# EAGLE board SHT31 (EAGLE 9.4.2)
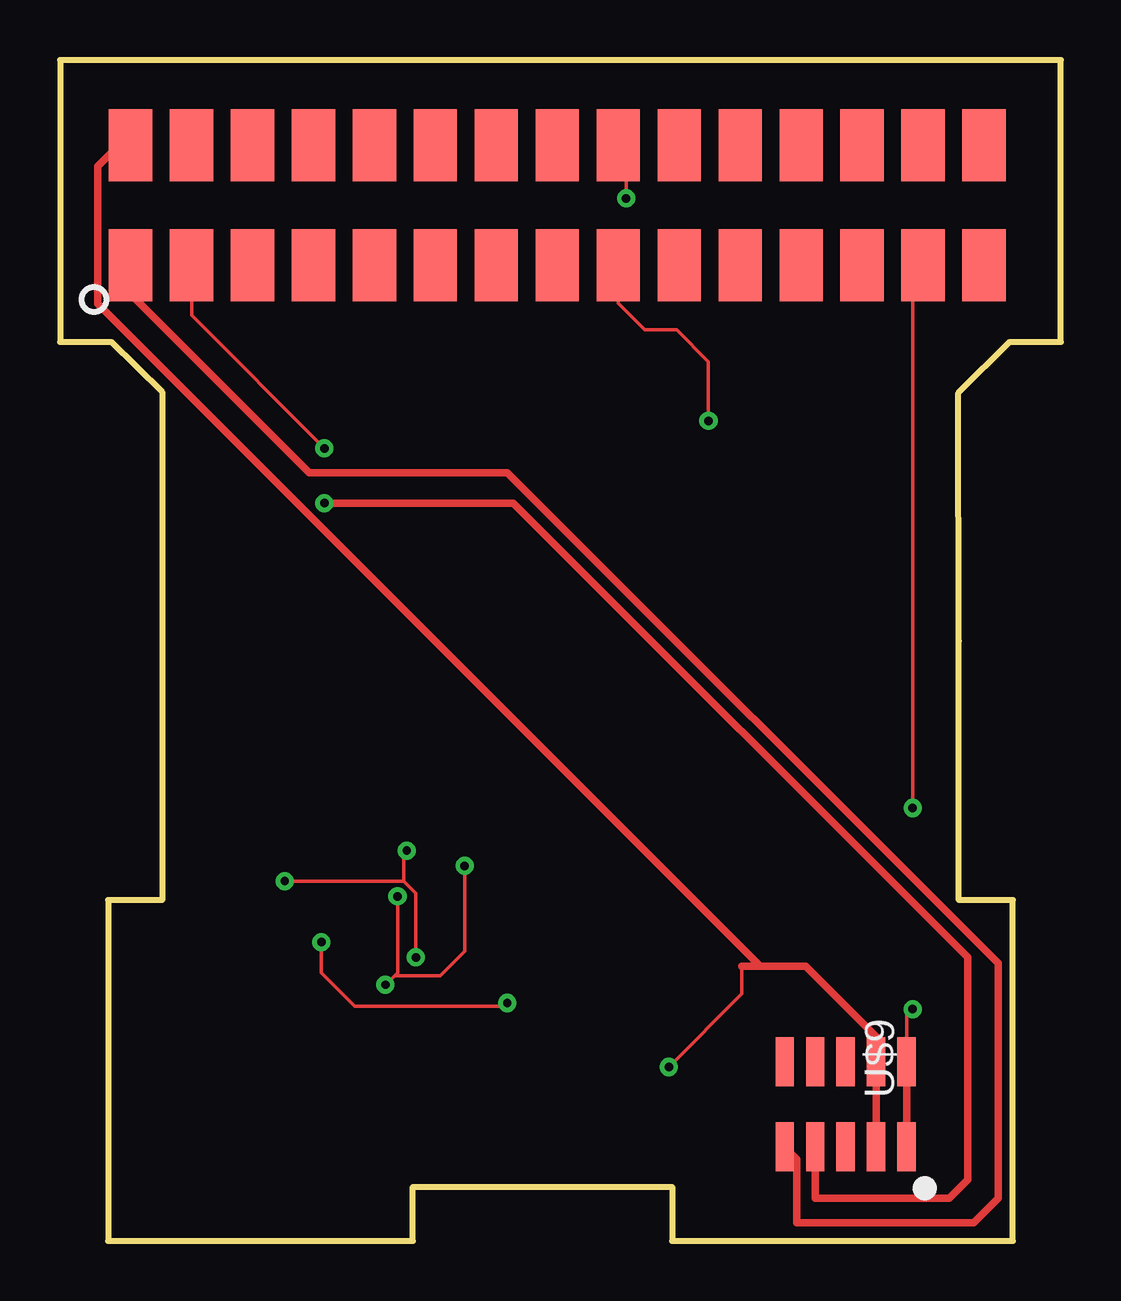
[diagram p0: board, top side]
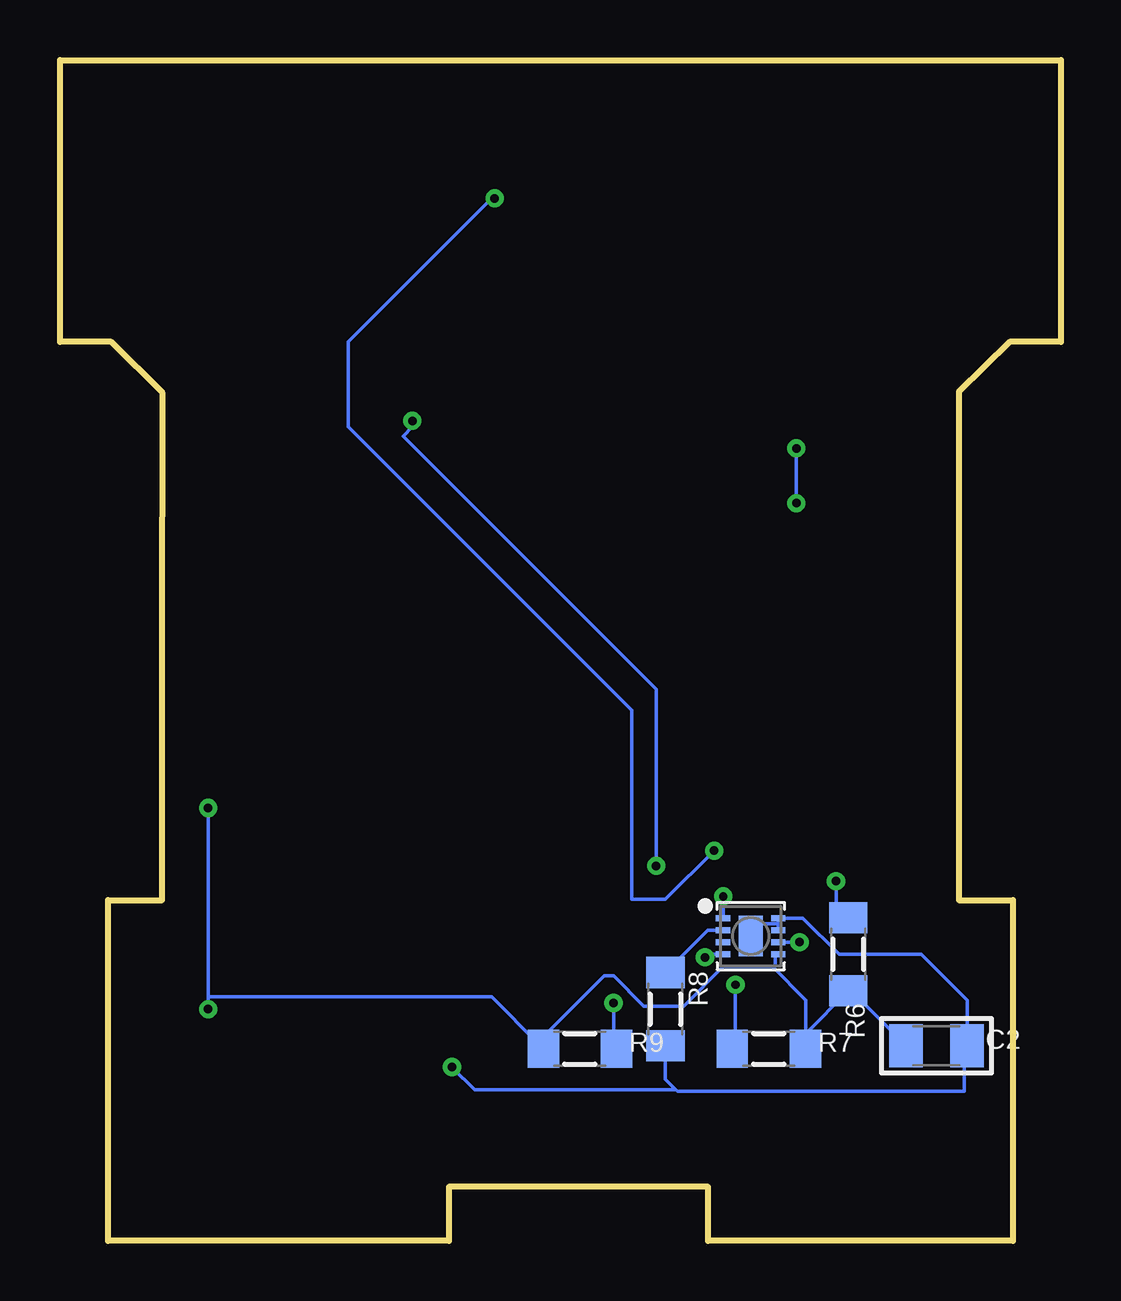
[diagram p1: board, bottom side, seen from below]

Size 41.7 x 49.2 mm. Coordinates in mm from the lower left corner, seen from the top.
Outline: 39.7,0 39.7,14.2 37.45,14.2 37.45,24.99 37.43,35.33 39.58,37.45 41.7,37.45 41.7,49.2 0,49.2 0,37.45 2.12,37.45 4.25,35.38 4.25,14.2 2,14.2 2,0 14.7,0 14.7,2.25 25.5,2.25 25.5,0 39.7,0
Copper layers (1*16): Top 0.035mm / dielectric 1.5mm / Bottom 0.035mm
Design rules "default *": minimum track width 6mil, minimum drill 0.35mm, track to track 6mil, track to pad 6mil, pad to pad 6mil, via to via 6mil, smd to smd 6mil, copper to edge 10mil, drill to drill 6mil, minimum pad ring 10mil, minimum via ring 8mil, stop-mask expansion 4mil, vias tented up to drill 0mil, thermal gap 10mil

## Footprints (pad centres in the part's own frame; a part is rotated, then mirrored left to right if it is on the bottom)
_1206 = smd 1.4 x 1.8: 1 -1.27,0; 2 1.27,0
2X15SMD = smd 3 x 1.8: P$1 -2.5,17.78; P$2 2.5,17.78; P$3 -2.5,15.24; P$4 2.5,15.24; P$5 -2.5,12.7; P$6 2.5,12.7; P$7 -2.5,10.16; P$8 2.5,10.16; P$9 -2.5,7.62; P$10 2.5,7.62; P$11 -2.5,5.08; P$12 2.5,5.08; P$13 -2.5,2.54; P$14 2.5,2.54; P$15 -2.5,0; P$16 2.5,0; P$17 -2.5,-2.54; P$18 2.5,-2.54; P$19 -2.5,-5.08; P$20 2.5,-5.08; P$21 -2.5,-7.62; P$22 2.5,-7.62; P$23 -2.5,-10.16; P$24 2.5,-10.16; P$25 -2.5,-12.7; P$26 2.5,-12.7; P$27 -2.5,-15.24; P$28 2.5,-15.24; P$29 -2.5,-17.78; P$30 2.5,-17.78
_1206MP = smd 1.3 x 1.6: 1 -1.524,0; 2 1.524,0
SHT3X = smd 0.6 x 0.25: 1 -1.15,0.75; 2 -1.15,0.25; 3 -1.15,-0.25; 4 -1.15,-0.75; 5 1.15,-0.75; 6 1.15,-0.25; 7 1.15,0.25; 8 1.15,0.75 | smd 1 x 1.7: THERMAL 0,0
CONN = smd 2.05 x 0.76: 1 1.775,2.54; 2 -1.775,2.54; 3 1.775,1.27; 4 -1.775,1.27; 5 1.775,0; 6 -1.775,0; 7 1.775,-1.27; 8 -1.775,-1.27; 9 1.775,-2.54; 10 -1.775,-2.54

## Placement (x,y rotation side)
C2  10uF  [_1206]  5.17,8.13 0 bottom
CN2  CON_PINHD-2X15  [2X15SMD]  20.72,43.16 90 top
R6  10K  [_1206MP]  8.86,11.94 270 bottom
R7  10K  [_1206MP]  12.16,8 0 bottom
R8  10K  [_1206MP]  16.48,9.65 270 bottom
R9  10K  [_1206MP]  20.03,8 0 bottom
U2  SHT31-DIS  [SHT3X]  12.92,12.7 0 bottom
U$9  PLANTOWER  [CONN]  32.73,5.69 270 top

## Library data of the parts
C2 R6-R9 U2 = microbuilder
CN2 = akita
U$9 = Airbeam

## Nets
ADDR: R8.1 U2.2
GND: C2.2 CN2.P$2 R8.2 U2.7 U2.8 U2.THERMAL U$9.3 U$9.4
PT_RST: U$9.5
PT_RX: CN2.P$3 U$9.7
PT_TX: CN2.P$1 U$9.9
RST: R9.2 U2.6
SCL: CN2.P$18 R6.1 U2.4
SDA: CN2.P$17 R7.1 U2.1
SLEEP_PT: U$9.10
VDD: C2.1 CN2.P$27 R6.2 R7.2 R9.1 U2.5 U$9.1 U$9.2

## Tracks (layer width: path | path; a pad name or v marks a point on that pad's centre or on a via)
ADDR
  Bottom 0.152: R8.1 14.7,12.95 U2.2
GND  (via drill 0.35)
  Top 0.152: v25.37,7.24 28.42,10.29 28.42,11.43
  Top 0.305: 29.18,11.43 1.57,39.04 1.57,44.78 2.44,45.65 CN2.P$2 | 28.42,11.43 29.18,11.43 | 29.18,11.43 31.08,11.43 34,8.51 U$9.4 U$9.3
  Bottom 0.152: R8.2 16.48,6.73 16.03,6.29 | 16.03,6.29 15.97,6.22 4.03,6.22 4.03,8 C2.2 3.91,10.03 5.81,11.94 9.24,11.94 10.75,13.45 U2.8 11.77,13.21 | U2.7 11.77,13.21 | 11.77,13.21 12.41,13.21 U2.THERMAL | 16.03,6.29 24.42,6.29 v25.37,7.24 25.5,7.37
PT_RX  (via drill 0.35)
  Top 0.152: v11.02,33.02 5.48,38.56 CN2.P$3
  Top 0.305: v11.02,30.73 18.89,30.73 37.81,11.81 37.81,2.54 37.05,1.78 31.46,1.78 U$9.7
  Bottom 0.152: v11.02,30.73 v11.02,33.02 11.02,33.27
PT_TX
  Top 0.305: U$9.9 30.7,3.41 30.7,0.76 38.07,0.76 39.08,1.78 39.08,11.56 18.64,32 10.38,32 3.14,39.24 3.14,40.45 CN2.P$1
RST  (via drill 0.35)
  Top 0.152: v10.89,12.45 10.89,11.18 12.29,9.78 18.51,9.78 v18.64,9.91
  Bottom 0.152: U2.6 v10.89,12.45 | v18.64,9.91 18.64,8.13 R9.2
SCL  (via drill 0.35)
  Top 0.152: v14.83,11.81 14.83,14.48 14.32,14.99 | 14.32,14.99 v9.37,14.99 | 14.32,14.99 14.32,16.13 v14.45,16.26 | v23.59,43.43 23.59,45.32 CN2.P$18
  Bottom 0.152: U2.4 14.69,11.95 v14.83,11.81 | v9.37,14.99 9.37,13.97 R6.1 | v14.45,16.26 16.48,14.22 17.88,14.22 17.88,22.1 29.69,33.91 29.69,37.47 23.72,43.43 v23.59,43.43
SDA  (via drill 0.35)
  Top 0.152: v14.06,14.35 14.06,11.18 v13.56,10.67 13.94,11.05 15.84,11.05 16.86,12.06 v16.86,15.62 | v27.02,34.16 27.02,36.63 25.69,37.96 24.37,37.96 23.26,39.06 CN2.P$17
  Bottom 0.152: U2.1 14.07,14.09 14.06,14.1 v14.06,14.35 | v13.56,10.67 13.56,8.13 R7.1 | v16.86,15.62 16.86,22.99 27.4,33.53 27.02,33.91 v27.02,34.16
VDD  (via drill 0.35)
  Top 0.152: v35.53,18.03 35.53,40.22 CN2.P$27 | v35.53,9.65 35.27,9.4 U$9.2
  Top 0.305: U$9.2 U$9.1
  Bottom 0.152: v35.53,9.65 35.53,10.16 | 35.53,10.16 35.53,17.78 35.66,17.91 v35.53,18.03 | R7.2 10.64,8.38 10.64,8.64 | 10.64,8.64 R6.2 8.73,10.41 C2.1 | R9.1 21.75,8.19 | 21.75,8.19 23.72,10.16 35.53,10.16 | U2.5 11.91,11.82 11.91,11.43 12.03,11.43 | 12.03,11.43 14.06,11.43 15.72,9.78 17.37,9.78 18.64,11.05 19.02,11.05 21.75,8.32 21.75,8.19 | 12.03,11.43 10.64,10.03 10.64,8.64